# EAGLE board pcb_v2 (EAGLE 6.1)
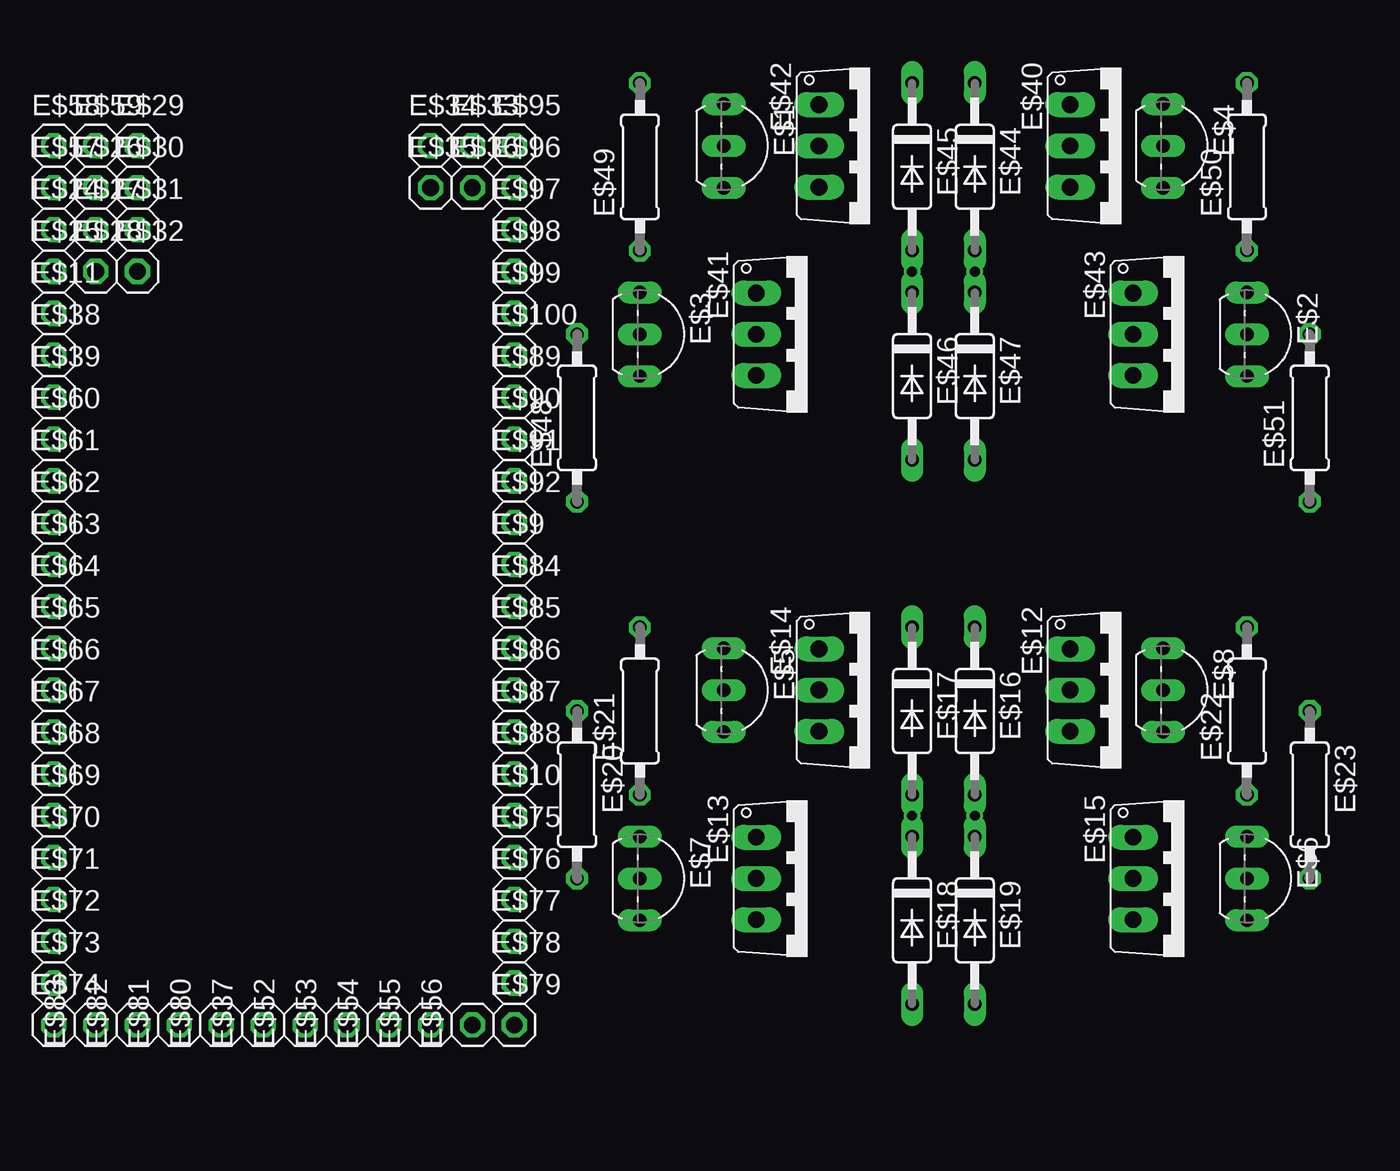
[diagram p0: board, top side]
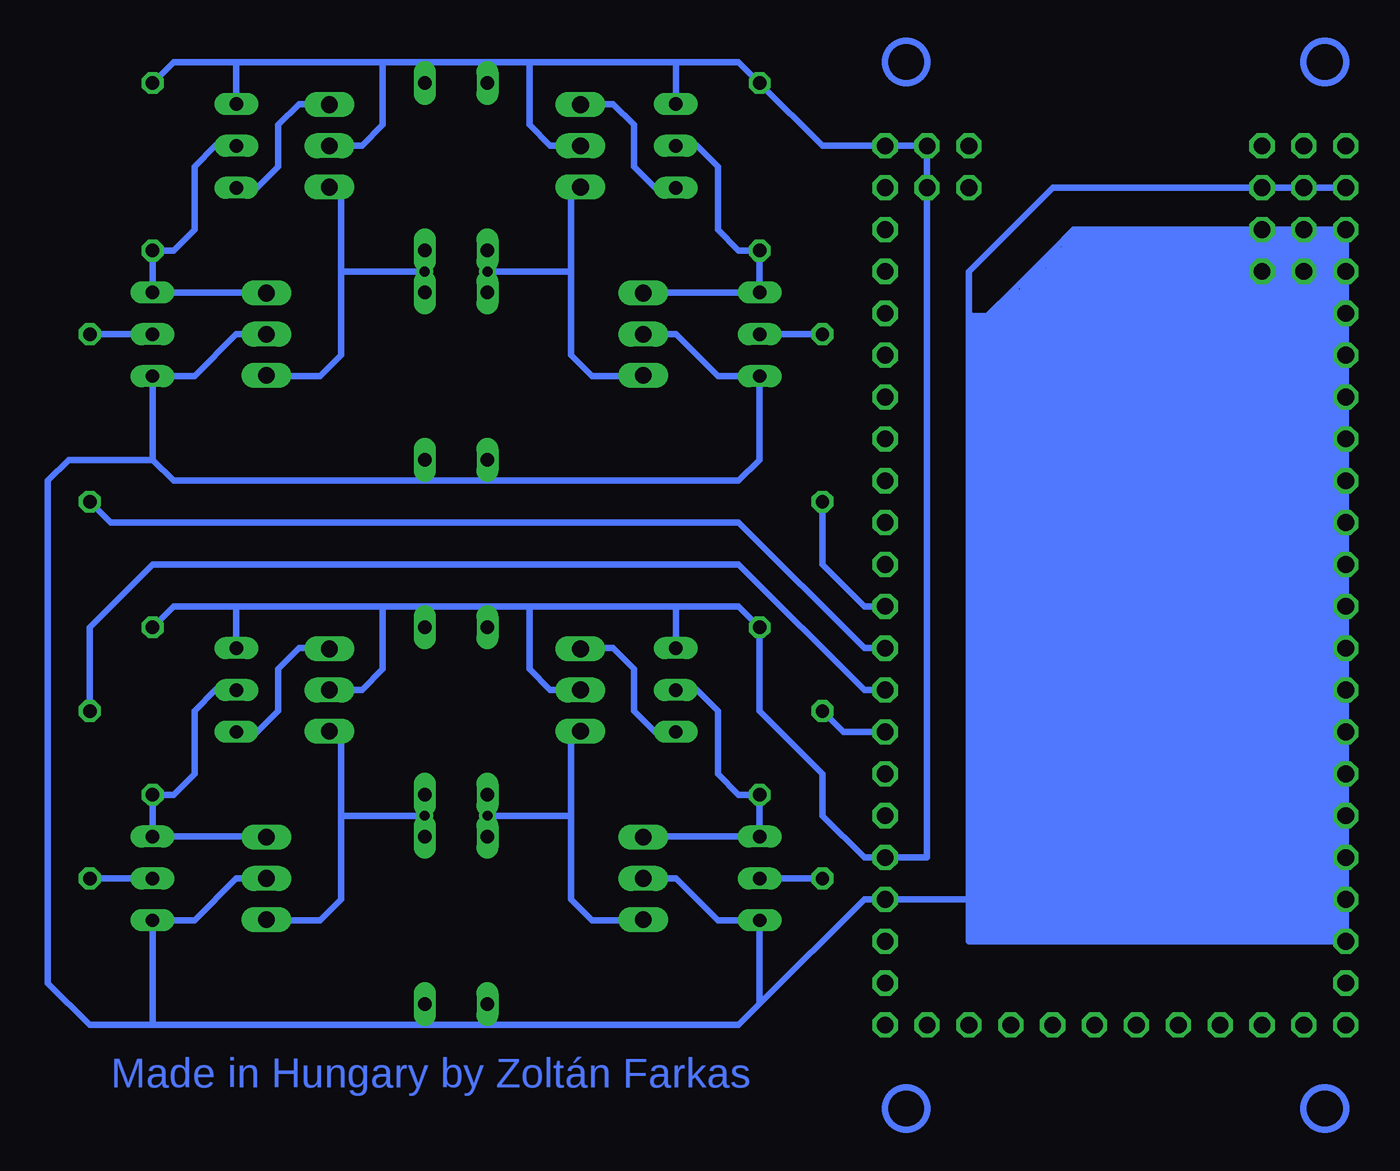
[diagram p1: board, bottom side, seen from below]

No outline drawn. Coordinates in mm, seen from the top.
Copper layers (1*16): Top 0.035mm / dielectric 1.5mm / Bottom 0.035mm
Design rules: minimum track width 10mil, minimum drill 24mil, track to track 8mil, track to pad 8mil, pad to pad 8mil, via to via 8mil, smd to smd 8mil, copper to edge 40mil, drill to drill 8mil, minimum pad ring 10mil, minimum via ring 8mil, stop-mask expansion 4mil, vias tented up to drill 0mil, thermal gap 10mil

## Footprints (pad centres in the part's own frame; a part is rotated, then mirrored left to right if it is on the bottom)
TO92-CBE = drill 0.813 long: B 0,0; C -2.54,0; E 2.54,0
1X01 = drill 1.016 octagon: 1 0,0
T-30_V = drill 1.016 long: 1 -2.5,-3.1; 2 0,-3.1; 3 2.5,-3.1
C2992 = drill 0.813 long: A 5.08,0; C -5.08,0
0207/10 = drill 0.813 octagon: 1 -5.08,0; 2 5.08,0

## Placement (x,y rotation side)
E$1  [TO92-CBE]  43.18,92.71 270 top
E$2  [TO92-CBE]  74.93,81.28 270 top
E$3  [TO92-CBE]  38.1,81.28 270 top
E$4  [TO92-CBE]  69.85,92.71 270 top
E$5  [TO92-CBE]  43.18,59.69 270 top
E$6  [TO92-CBE]  74.93,48.26 270 top
E$7  [TO92-CBE]  38.1,48.26 270 top
E$8  [TO92-CBE]  69.85,59.69 270 top
E$9  [1X01]  30.48,67.31 0 top
E$10  [1X01]  30.48,52.07 0 top
E$11  [1X01]  2.54,82.55 0 top
E$12  [T-30_V]  67.31,59.69 270 top
E$13  [T-30_V]  48.26,48.26 270 top
E$14  [T-30_V]  52.07,59.69 270 top
E$15  [T-30_V]  71.12,48.26 270 top
E$16  [C2992]  58.42,58.42 270 top
E$17  [C2992]  54.61,58.42 270 top
E$18  [C2992]  54.61,45.72 270 top
E$19  [C2992]  58.42,45.72 270 top
E$20  [0207/10]  34.29,53.34 270 top
E$21  [0207/10]  38.1,58.42 90 top
E$22  [0207/10]  74.93,58.42 90 top
E$23  [0207/10]  78.74,53.34 270 top
E$24  [1X01]  2.54,87.63 0 top
E$25  [1X01]  2.54,85.09 0 top
E$26  [1X01]  5.08,90.17 0 top
E$27  [1X01]  5.08,87.63 0 top
E$28  [1X01]  5.08,85.09 0 top
E$29  [1X01]  7.62,92.71 0 top
E$30  [1X01]  7.62,90.17 0 top
E$31  [1X01]  7.62,87.63 0 top
E$32  [1X01]  7.62,85.09 0 top
E$33  [1X01]  27.94,92.71 0 top
E$34  [1X01]  25.4,92.71 0 top
E$35  [1X01]  25.4,90.17 0 top
E$36  [1X01]  27.94,90.17 0 top
E$37  [1X01]  15.24,39.37 90 top
E$38  [1X01]  2.54,80.01 0 top
E$39  [1X01]  2.54,77.47 0 top
E$40  [T-30_V]  67.31,92.71 270 top
E$41  [T-30_V]  48.26,81.28 270 top
E$42  [T-30_V]  52.07,92.71 270 top
E$43  [T-30_V]  71.12,81.28 270 top
E$44  [C2992]  58.42,91.44 270 top
E$45  [C2992]  54.61,91.44 270 top
E$46  [C2992]  54.61,78.74 270 top
E$47  [C2992]  58.42,78.74 270 top
E$48  [0207/10]  34.29,76.2 90 top
E$49  [0207/10]  38.1,91.44 90 top
E$50  [0207/10]  74.93,91.44 90 top
E$51  [0207/10]  78.74,76.2 90 top
E$52  [1X01]  17.78,39.37 90 top
E$53  [1X01]  20.32,39.37 90 top
E$54  [1X01]  22.86,39.37 90 top
E$55  [1X01]  25.4,39.37 90 top
E$56  [1X01]  27.94,39.37 90 top
E$57  [1X01]  2.54,90.17 0 top
E$58  [1X01]  2.54,92.71 0 top
E$59  [1X01]  5.08,92.71 0 top
E$60  [1X01]  2.54,74.93 0 top
E$61  [1X01]  2.54,72.39 0 top
E$62  [1X01]  2.54,69.85 0 top
E$63  [1X01]  2.54,67.31 0 top
E$64  [1X01]  2.54,64.77 0 top
E$65  [1X01]  2.54,62.23 0 top
E$66  [1X01]  2.54,59.69 0 top
E$67  [1X01]  2.54,57.15 0 top
E$68  [1X01]  2.54,54.61 0 top
E$69  [1X01]  2.54,52.07 0 top
E$70  [1X01]  2.54,49.53 0 top
E$71  [1X01]  2.54,46.99 0 top
E$72  [1X01]  2.54,44.45 0 top
E$73  [1X01]  2.54,41.91 0 top
E$74  [1X01]  2.54,39.37 0 top
E$75  [1X01]  30.48,49.53 0 top
E$76  [1X01]  30.48,46.99 0 top
E$77  [1X01]  30.48,44.45 0 top
E$78  [1X01]  30.48,41.91 0 top
E$79  [1X01]  30.48,39.37 0 top
E$80  [1X01]  12.7,39.37 90 top
E$81  [1X01]  10.16,39.37 90 top
E$82  [1X01]  7.62,39.37 90 top
E$83  [1X01]  5.08,39.37 90 top
E$84  [1X01]  30.48,64.77 0 top
E$85  [1X01]  30.48,62.23 0 top
E$86  [1X01]  30.48,59.69 0 top
E$87  [1X01]  30.48,57.15 0 top
E$88  [1X01]  30.48,54.61 0 top
E$89  [1X01]  30.48,77.47 0 top
E$90  [1X01]  30.48,74.93 0 top
E$91  [1X01]  30.48,72.39 0 top
E$92  [1X01]  30.48,69.85 0 top
E$95  [1X01]  30.48,92.71 0 top
E$96  [1X01]  30.48,90.17 0 top
E$97  [1X01]  30.48,87.63 0 top
E$98  [1X01]  30.48,85.09 0 top
E$99  [1X01]  30.48,82.55 0 top
E$100  [1X01]  30.48,80.01 0 top

## Library data of the parts
E$1-E$8 E$12-E$15 E$40-E$43 = transistor
E$9-E$11 E$24-E$39 E$52-E$92 E$95-E$100 = pinhead
E$16-E$19 E$44-E$47 = diode
E$20-E$23 E$48-E$51 = resistor

## Nets
S$2: E$2.C E$4.B E$50.1
S$4: E$4.E
S$5: E$3.B E$48.2
S$6: E$2.B E$51.2
S$7: E$5.B E$7.C E$21.1
S$8: E$2.E E$3.E E$6.E E$7.E E$18.A E$19.A E$24.1 E$26.1 E$46.A E$47.A E$57.1 E$72.1
S$9: E$1.B E$3.C E$49.1
S$10: E$1.E
S$11: E$5.E
S$12: E$17.A E$18.C
S$14: E$8.E
S$15: E$1.C E$4.C E$5.C E$8.C E$16.C E$17.C E$21.2 E$22.2 E$33.1 E$44.C E$45.C E$49.2 E$50.2 E$75.1 E$95.1
S$16: E$6.C E$8.B E$22.1
S$17: E$6.B E$23.2
S$18: E$20.1 E$87.1
S$19: E$16.A E$19.C
S$20: E$51.1 E$85.1
S$21: E$7.B E$20.2
S$22: E$45.A E$46.C
S$23: E$48.1 E$84.1
S$24: E$23.1 E$86.1
S$25: E$44.A E$47.C

## Tracks (layer width: path | path; a pad name or v marks a point on that pad's centre or on a via)
S$1  (via drill 0.6)
  Bottom 0.406: 49.53,57.15 49.53,52.07 | 49.53,52.07 49.53,46.99 48.26,45.72 45.72,45.72 | v54.61,52.07 49.53,52.07
S$2
  Bottom 0.406: E$4.B 71.12,92.71 72.39,91.44 72.39,87.63 73.66,86.36 E$50.1 E$2.C 68.58,83.82
S$3  (via drill 0.6)
  Bottom 0.406: 63.5,52.07 63.5,46.99 64.77,45.72 67.31,45.72 | 63.5,52.07 63.5,57.15 | v58.42,52.07 63.5,52.07
S$4
  Bottom 0.406: 64.77,95.25 66.04,95.25 67.31,93.98 67.31,91.44 68.58,90.17 E$4.E
S$5
  Bottom 0.406: E$3.B E$48.2
S$6
  Bottom 0.406: E$2.B E$51.2
S$7
  Bottom 0.406: E$5.B 41.91,59.69 40.64,58.42 40.64,54.61 39.37,53.34 E$21.1 E$7.C 44.45,50.8
S$8
  Bottom 0.406: 44.45,48.26 43.18,48.26 40.64,45.72 E$7.E 38.1,40.64 | 74.93,39.37 E$6.E 72.39,45.72 69.85,48.26 68.58,48.26 | 54.61,72.39 58.42,72.39 | 58.42,72.39 73.66,72.39 74.93,73.66 | E$47.A 58.42,72.39 | E$46.A 54.61,72.39 | 54.61,72.39 39.37,72.39 38.1,73.66 E$3.E 40.64,78.74 43.18,81.28 44.45,81.28 | 74.93,73.66 E$2.E 72.39,78.74 69.85,81.28 68.58,81.28 | 74.93,73.66 80.01,73.66 81.28,72.39 81.28,41.91 78.74,39.37 74.93,39.37 | 54.61,39.37 58.42,39.37 | 58.42,39.37 74.93,39.37 | E$19.A 58.42,39.37 | E$18.A 54.61,39.37 | 54.61,39.37 39.37,39.37 38.1,40.64 | 25.4,46.99 31.75,46.99 38.1,40.64 | E$57.1 E$26.1 20.32,90.17 25.4,85.09 25.4,82.55 | 25.4,82.55 25.4,81.28 | 25.4,81.28 25.4,80.01 | 25.4,80.01 25.4,46.99 | 24.13,82.55 22.86,83.82 | 22.86,83.82 21.59,85.09 | 21.59,85.09 20.32,86.36 | 20.32,86.36 19.05,87.63 | 17.78,87.63 19.05,87.63 | 20.32,85.09 20.32,86.36 | 20.32,86.36 19.05,86.36 | 19.05,86.36 21.59,85.09 | 21.59,85.09 20.32,83.82 20.32,85.09 | 21.59,85.09 20.32,85.09 | 20.32,85.09 19.05,87.63 | 19.05,87.63 19.05,86.36 | 20.32,85.09 21.59,83.82 | 21.59,83.82 22.86,82.55 | 22.86,82.55 24.13,81.28 | 24.13,81.28 25.4,81.28 | 25.4,81.28 24.13,82.55 | 24.13,82.55 24.13,81.28 | 24.13,81.28 22.86,83.82 | 22.86,83.82 21.59,83.82 | 21.59,83.82 25.4,81.28 | 25.4,81.28 20.32,85.09 | 20.32,85.09 19.05,86.36 | 25.4,81.28 19.05,86.36 | 21.59,85.09 22.86,82.55 | 21.59,85.09 17.78,87.63 | 21.59,85.09 21.59,82.55 | 25.4,81.28 22.86,82.55 | 25.4,80.01 24.13,82.55 | 22.86,80.01 25.4,82.55 | 17.78,87.63 E$24.1 E$72.1 25.4,44.45 25.4,46.99
S$9
  Bottom 0.406: E$1.B 41.91,92.71 40.64,91.44 40.64,87.63 39.37,86.36 E$49.1 E$3.C 44.45,83.82
S$10
  Bottom 0.406: 48.26,95.25 46.99,95.25 45.72,93.98 45.72,91.44 44.45,90.17 E$1.E
S$11
  Bottom 0.406: 48.26,62.23 46.99,62.23 45.72,60.96 45.72,58.42 44.45,57.15 E$5.E
S$12
  Bottom 0.406: E$17.A E$18.C
S$13  (via drill 0.6)
  Bottom 0.406: 63.5,85.09 63.5,80.01 64.77,78.74 67.31,78.74 | 63.5,85.09 63.5,90.17 | v58.42,85.09 63.5,85.09
S$14
  Bottom 0.406: 64.77,62.23 66.04,62.23 67.31,60.96 67.31,58.42 68.58,57.15 E$8.E
S$15
  Bottom 0.406: 63.5,59.69 62.23,59.69 60.96,60.96 60.96,64.77 | 49.53,59.69 50.8,59.69 52.07,60.96 52.07,64.77 | 43.18,64.77 39.37,64.77 E$21.2 38.1,58.42 34.29,54.61 34.29,52.07 31.75,49.53 E$75.1 27.94,49.53 E$33.1 E$95.1 34.29,92.71 E$49.2 39.37,97.79 43.18,97.79 | 43.18,64.77 52.07,64.77 | 52.07,64.77 54.61,64.77 | 54.61,64.77 58.42,64.77 | 58.42,64.77 60.96,64.77 | 60.96,64.77 69.85,64.77 | 69.85,64.77 73.66,64.77 E$22.2 | E$5.C 43.18,64.77 | E$17.C 54.61,64.77 | E$16.C 58.42,64.77 | E$8.C 69.85,64.77 | 63.5,92.71 62.23,92.71 60.96,93.98 60.96,97.79 | 49.53,92.71 50.8,92.71 52.07,93.98 52.07,97.79 | 43.18,97.79 52.07,97.79 | 52.07,97.79 54.61,97.79 | 54.61,97.79 58.42,97.79 | 58.42,97.79 60.96,97.79 | 60.96,97.79 69.85,97.79 | 69.85,97.79 73.66,97.79 E$50.2 | E$1.C 43.18,97.79 | E$45.C 54.61,97.79 | E$44.C 58.42,97.79 | E$4.C 69.85,97.79
S$16
  Bottom 0.406: E$8.B 71.12,59.69 72.39,58.42 72.39,54.61 73.66,53.34 E$22.1 E$6.C 68.58,50.8
S$17
  Bottom 0.406: E$6.B E$23.2
S$18
  Bottom 0.406: E$87.1 33.02,57.15 E$20.1
S$19
  Bottom 0.406: E$16.A E$19.C
S$20
  Bottom 0.406: E$51.1 77.47,69.85 39.37,69.85 31.75,62.23 E$85.1
S$21
  Bottom 0.406: E$7.B E$20.2
S$22
  Bottom 0.406: E$45.A E$46.C
S$23
  Bottom 0.406: E$48.1 34.29,67.31 31.75,64.77 E$84.1
S$24
  Bottom 0.406: E$23.1 78.74,63.5 74.93,67.31 39.37,67.31 31.75,59.69 E$86.1
S$25
  Bottom 0.406: E$44.A E$47.C
S$26
  pour Bottom: 2.54,44.45 25.4,44.45 25.4,81.28 19.05,87.63 2.54,87.63
S$27  (via drill 0.6)
  Bottom 0.406: 49.53,90.17 49.53,85.09 | 49.53,85.09 49.53,80.01 48.26,78.74 45.72,78.74 | v54.61,85.09 49.53,85.09
(copper drawn outside any net)
  shapes: Bottom area x9, Bottom circle x4

## Text on the board
Bottom: Made in Hungary by Zoltán Farkas